# EAGLE board untitled (EAGLE 9.6.2)
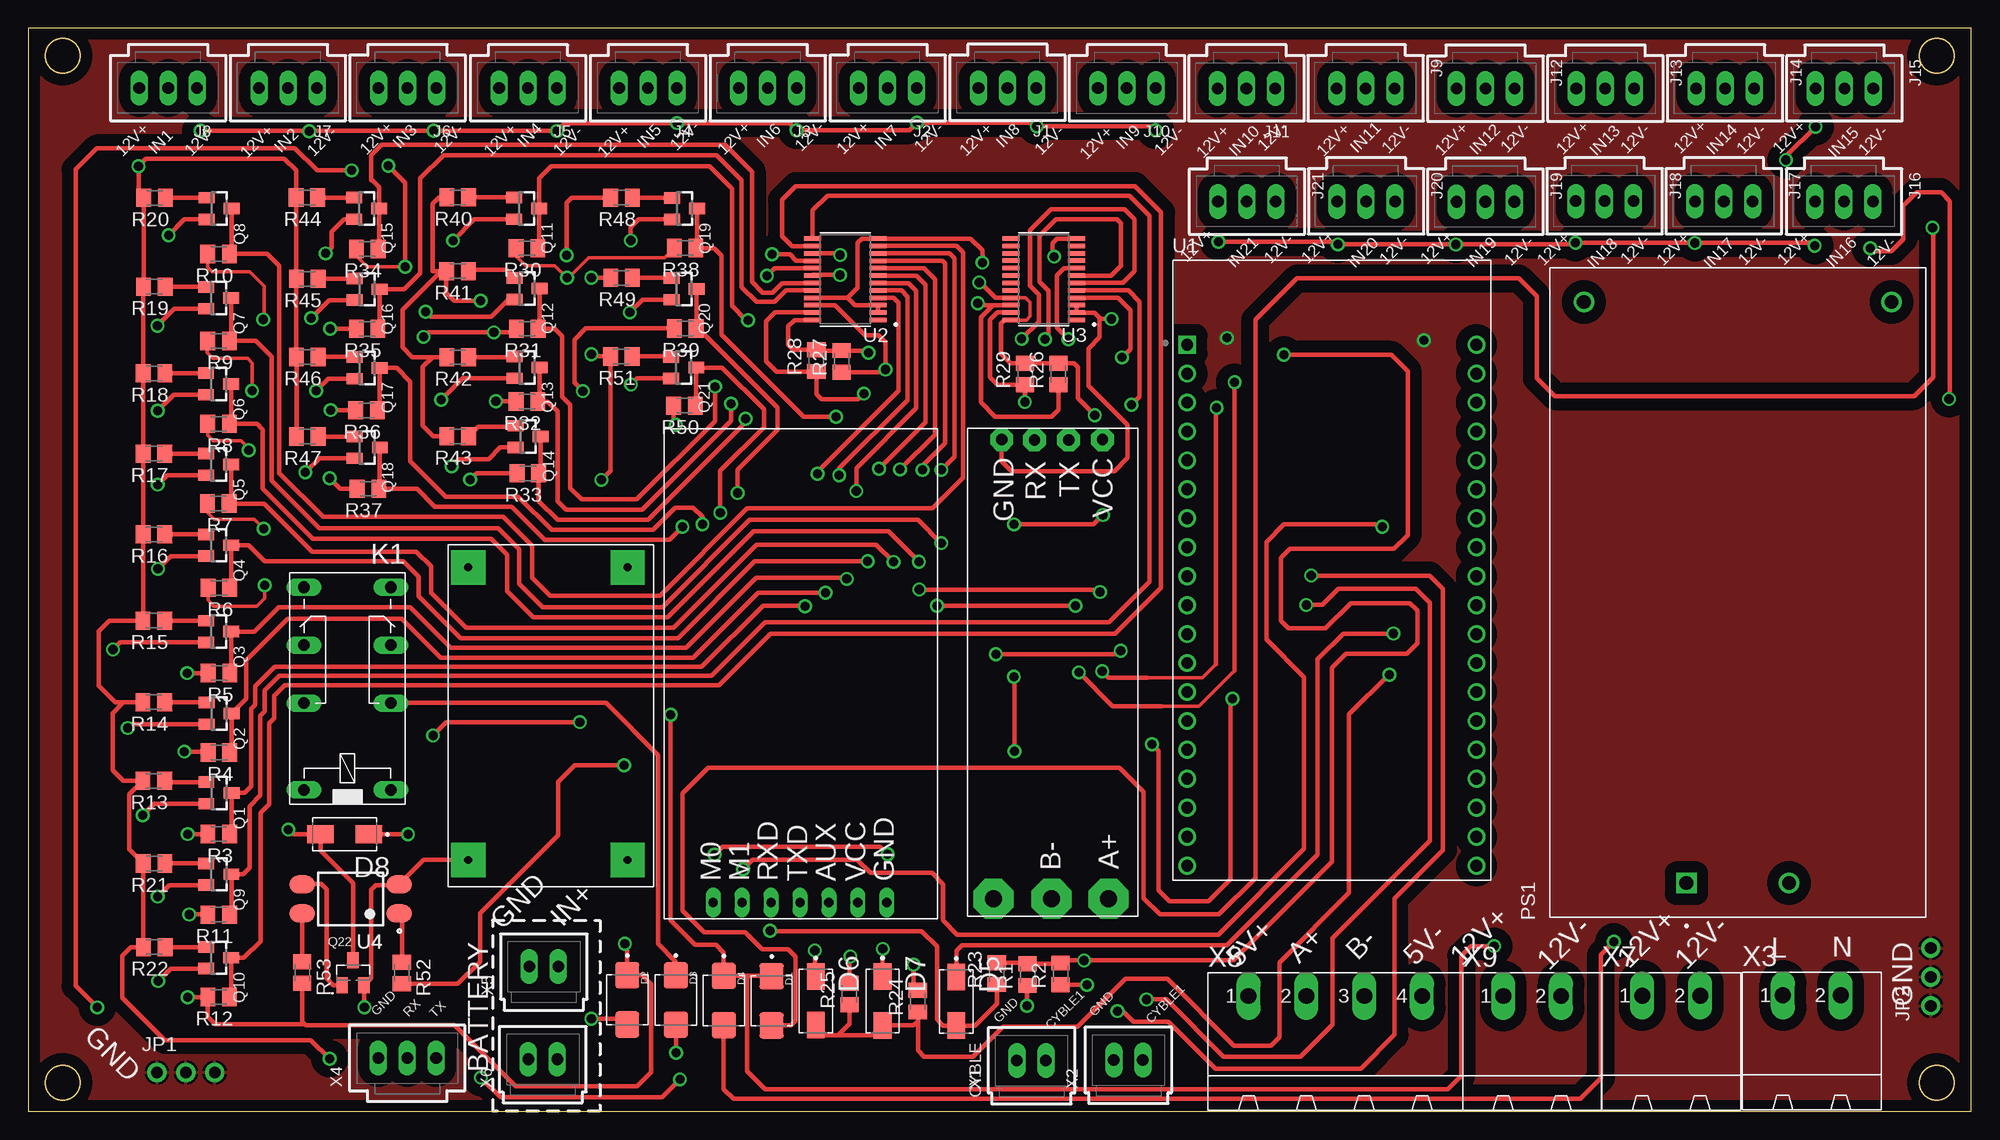
[diagram p0: board, top side]
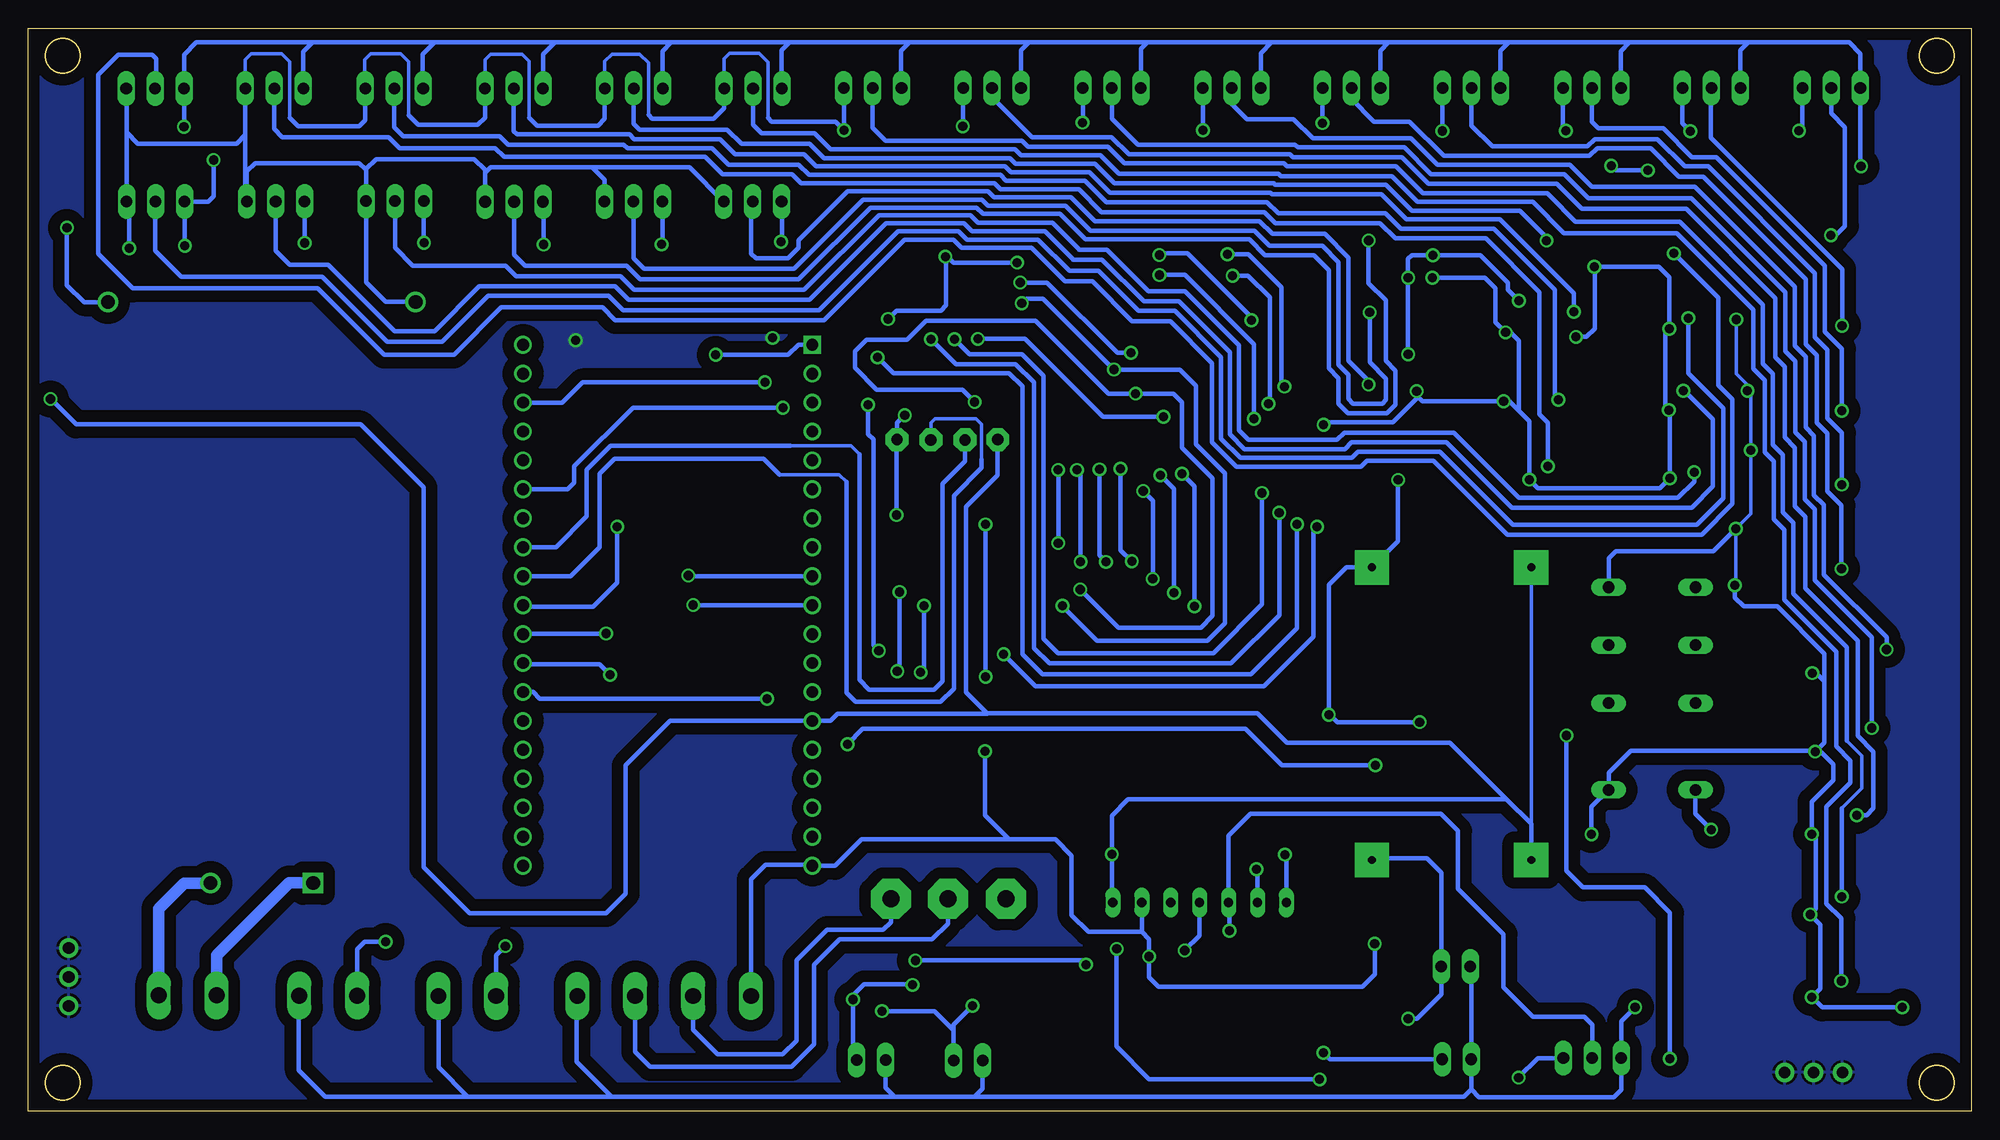
[diagram p1: board, bottom side, seen from below]

Size 170.5 x 95 mm. Coordinates in mm from the lower left corner, seen from the top.
Outline: 0,0 170.5,0 170.5,95 0,95 0,0
Outline: circle at 3,92.6 radius 1.5
Outline: circle at 3,2.5 radius 1.5
Outline: circle at 167.5,92.6 radius 1.5
Outline: circle at 167.5,2.5 radius 1.5
Copper layers (1*16): Top 0.035mm / dielectric 1.5mm / Bottom 0.035mm
Design rules "default": minimum track width 6mil, minimum drill 0.35mm, track to track 6mil, track to pad 6mil, pad to pad 6mil, via to via 6mil, smd to smd 6mil, copper to edge 40mil, drill to drill 6mil, minimum pad ring 10mil, minimum via ring 8mil, stop-mask expansion 4mil, vias tented up to drill 0mil, thermal gap 10mil

## Footprints (pad centres in the part's own frame; a part is rotated, then mirrored left to right if it is on the bottom)
DIOM5336X265N = smd 2.29 x 2.12: A 2.16,0; C -2.16,0
DIOM5226X240N = smd 2.33 x 1.55: A 2.135,0; C -2.135,0
EBYTEE220-900T22D = drill 0.8 pad 1.27 long: AUX -4.56,-10.98; GND -4.56,-16.06; M0 -4.56,-0.82; M1 -4.56,-3.36; RXD -4.56,-5.9; TXD -4.56,-8.44; VCC -4.56,-13.52
70543-03 = drill 1.016 long: 1 -2.54,0; 2 0,0; 3 2.54,0
1X03-CLEANBIG = drill 1.016 pad 1.676: 1 -2.54,0; 2 0,0; 3 2.54,0
351 = drill 1.016 long: 1 -3.81,-3.81; 16 -3.81,3.81; O1 8.89,-3.81; O2 8.89,3.81; P1 3.81,-3.81; P2 3.81,3.81; S1 13.97,-3.81; S2 13.97,3.81
MINI560 = drill 0.7 pad 3 square: IN+ 0,-1.27; IN- 0,-15.24; OUT+ 25.67,-1.27; OUT- 25.67,-15.24
CONV_HLK-20M12 = drill 1.2 square: 1 -25.5,4.5 | drill 1.2: 2 -25.5,-4.5; 3 25.5,13.5; 4 25.5,-13.5
SOT23-BEC = smd 1 x 1.4: B -0.95,-1.1; C 0,1.1; E 0.95,-1.1
SOT95P240X120-3N = smd 1 x 1.4: 1 -0.95,-1.1; 2 0.95,-1.1; 3 0,1.1
M0805 = smd 1.3 x 1.6: 1 -0.95,0; 2 0.95,0
TTL-RS485 = drill 1.5 pad 3.5 octagon: A -19.7,-6; B -19.7,-1; P$7 -19.7,4.1 | drill 1 pad 2 octagon: GND 20.6,3.37; RX 20.581,0.505; TX 20.583,-2.493; VCC 20.6,-5.47
MODULE_ESP32-DEVKITC-32D = drill 1.04 square: 1 -12.7,19.76 | drill 1.04: 2 -12.7,17.22; 3 -12.7,14.68; 4 -12.7,12.14; 5 -12.7,9.6; 6 -12.7,7.06; 7 -12.7,4.52; 8 -12.7,1.98; 9 -12.7,-0.56; 10 -12.7,-3.1; 11 -12.7,-5.64; 12 -12.7,-8.18; 13 -12.7,-10.72; 14 -12.7,-13.26; 15 -12.7,-15.8; 16 -12.7,-18.34; 17 -12.7,-20.88; 18 -12.7,-23.42; 19 -12.7,-25.96; 20 12.7,19.76; 21 12.7,17.22; 22 12.7,14.68; 23 12.7,12.14; 24 12.7,9.6; 25 12.7,7.06; 26 12.7,4.52; 27 12.7,1.98; 28 12.7,-0.56; 29 12.7,-3.1; 30 12.7,-5.64; 31 12.7,-8.18; 32 12.7,-10.72; 33 12.7,-13.26; 34 12.7,-15.8; 35 12.7,-18.34; 36 12.7,-20.88; 37 12.7,-23.42; 38 12.7,-25.96
SOP65P640X120-24N = smd 1.57 x 0.41: 1 -2.87,3.575; 2 -2.87,2.925; 3 -2.87,2.275; 4 -2.87,1.625; 5 -2.87,0.975; 6 -2.87,0.325; 7 -2.87,-0.325; 8 -2.87,-0.975; 9 -2.87,-1.625; 10 -2.87,-2.275; 11 -2.87,-2.925; 12 -2.87,-3.575; 13 2.87,-3.575; 14 2.87,-2.925; 15 2.87,-2.275; 16 2.87,-1.625; 17 2.87,-0.975; 18 2.87,-0.325; 19 2.87,0.325; 20 2.87,0.975; 21 2.87,1.625; 22 2.87,2.275; 23 2.87,2.925; 24 2.87,3.575
SOT254P975X400-4N = smd 2.25 x 1.6: 1 -4.25,1.27; 2 -4.25,-1.27; 3 4.25,-1.27; 4 4.25,1.27
70543-02 = drill 1.016 long: 1 -1.27,0; 2 1.27,0
MSTBA2 = drill 1.397 long: 1 -2.54,5.08; 2 2.54,5.08
MSTBA4 = drill 1.397 long: 1 -7.62,5.08; 2 -2.54,5.08; 3 2.54,5.08; 4 7.62,5.08

## Placement (x,y rotation side)
D1  SS24  [DIOM5336X265N]  65.22,9.67 270 top
D2  SS24  [DIOM5336X265N]  52.55,9.76 270 top
D3  SS24  [DIOM5336X265N]  56.82,9.75 270 top
D4  SS24  [DIOM5336X265N]  61.03,9.7 270 top
D5  US1M-13  [DIOM5226X240N]  81.44,9.63 270 top
D6  US1M-13  [DIOM5226X240N]  69.1,9.67 270 top
D7  US1M-13  [DIOM5226X240N]  74.96,9.67 270 top
D8  US1M-13  [DIOM5226X240N]  27.76,24.29 180 top
EBYTEE220-900T22D1  [EBYTEE220-900T22D]  59.27,22.87 90 top
J1  C-GRID-03-70543  [70543-03]  85.93,89.79 180 top
J2  C-GRID-03-70543  [70543-03]  75.41,89.78 180 top
J3  C-GRID-03-70543  [70543-03]  64.89,89.76 180 top
J4  C-GRID-03-70543  [70543-03]  54.38,89.76 180 top
J5  C-GRID-03-70543  [70543-03]  43.85,89.76 180 top
J6  C-GRID-03-70543  [70543-03]  33.27,89.78 180 top
J7  C-GRID-03-70543  [70543-03]  22.78,89.77 180 top
J8  C-GRID-03-70543  [70543-03]  12.26,89.77 180 top
J9  C-GRID-03-70543  [70543-03]  117.37,89.75 180 top
J10  C-GRID-03-70543  [70543-03]  96.41,89.76 180 top
J11  C-GRID-03-70543  [70543-03]  106.9,89.75 180 top
J12  C-GRID-03-70543  [70543-03]  127.89,89.72 180 top
J13  C-GRID-03-70543  [70543-03]  138.4,89.74 180 top
J14  C-GRID-03-70543  [70543-03]  148.92,89.75 180 top
J15  C-GRID-03-70543  [70543-03]  159.38,89.74 180 top
J16  C-GRID-03-70543  [70543-03]  159.35,79.82 180 top
J17  C-GRID-03-70543  [70543-03]  148.8,79.84 180 top
J18  C-GRID-03-70543  [70543-03]  138.33,79.84 180 top
J19  C-GRID-03-70543  [70543-03]  127.88,79.8 180 top
J20  C-GRID-03-70543  [70543-03]  117.4,79.83 180 top
J21  C-GRID-03-70543  [70543-03]  106.94,79.81 180 top
JP1  [1X03-CLEANBIG]  13.82,3.39 0 top
JP2  [1X03-CLEANBIG]  166.97,11.77 90 top
K1  351  [351]  28,32 90 top
MINI1  [MINI560]  53.85,47.71 270 top
PS1  HLK-20M12  [CONV_HLK-20M12]  150.02,45.51 90 top
Q1  MMBT2222  [SOT23-BEC]  16.72,27.92 270 top
Q2  MMBT2222  [SOT23-BEC]  16.72,34.89 270 top
Q3  MMBT2222  [SOT23-BEC]  16.71,42.08 270 top
Q4  MMBT2222  [SOT23-BEC]  16.7,49.66 270 top
Q5  MMBT2222  [SOT23-BEC]  16.69,56.75 270 top
Q6  MMBT2222  [SOT23-BEC]  16.68,63.81 270 top
Q7  MMBT2222  [SOT23-BEC]  16.7,71.36 270 top
Q8  MMBT2222  [SOT23-BEC]  16.75,79.2 270 top
Q9  MMBT2222  [SOT23-BEC]  16.72,20.78 270 top
Q10  MMBT2222  [SOT23-BEC]  16.7,13.46 270 top
Q11  MMBT2222  [SOT23-BEC]  43.73,79.21 270 top
Q12  MMBT2222  [SOT23-BEC]  43.77,72.17 270 top
Q13  MMBT2222  [SOT23-BEC]  43.77,65.26 270 top
Q14  MMBT2222  [SOT23-BEC]  43.87,59.19 270 top
Q15  MMBT2222  [SOT23-BEC]  29.7,79.21 270 top
Q16  MMBT2222  [SOT23-BEC]  29.71,72.12 270 top
Q17  MMBT2222  [SOT23-BEC]  29.73,65.22 270 top
Q18  MMBT2222  [SOT23-BEC]  29.74,58.23 270 top
Q19  MMBT2222  [SOT23-BEC]  57.59,79.19 270 top
Q20  MMBT2222  [SOT23-BEC]  57.54,72.14 270 top
Q21  MMBT2222  [SOT23-BEC]  57.52,65.24 270 top
Q22  S9013  [SOT95P240X120-3N]  28.48,12.15 0 top
R1  560  [M0805]  87.69,11.97 90 top
R2  560  [M0805]  90.59,12.04 90 top
R3  1k  [M0805]  16.7,24.32 180 top
R4  1k  [M0805]  16.71,31.47 180 top
R5  1k  [M0805]  16.73,38.44 180 top
R6  1k  [M0805]  16.71,45.92 180 top
R7  1k  [M0805]  16.67,53.32 180 top
R8  1k  [M0805]  16.69,60.31 180 top
R9  1k  [M0805]  16.69,67.58 180 top
R10  1k  [M0805]  16.69,75.21 180 top
R11  1k  [M0805]  16.71,17.24 180 top
R12  1k  [M0805]  16.69,10.01 180 top
R13  30k  [M0805]  11,28.98 180 top
R14  30k  [M0805]  11,35.88 180 top
R15  30k  [M0805]  11,43.04 180 top
R16  30k  [M0805]  11.01,50.62 180 top
R17  30k  [M0805]  11.01,57.69 180 top
R18  30k  [M0805]  11.03,64.74 180 top
R19  30k  [M0805]  11.05,72.35 180 top
R20  30k  [M0805]  11.07,80.14 180 top
R21  30k  [M0805]  11.03,21.73 180 top
R22  30k  [M0805]  11.04,14.39 180 top
R23  10k  [M0805]  84.99,12.06 90 top
R24  10k  [M0805]  78.06,9.65 90 top
R25  10k  [M0805]  72.06,10.27 90 top
R26  10k  [M0805]  90.4,64.68 90 top
R27  10k  [M0805]  71.37,65.79 90 top
R28  10k  [M0805]  69.15,65.85 90 top
R29  10k  [M0805]  87.47,64.69 90 top
R30  1k  [M0805]  43.75,75.72 180 top
R31  1k  [M0805]  43.78,68.65 180 top
R32  1k  [M0805]  43.76,62.27 180 top
R33  1k  [M0805]  43.83,55.97 180 top
R34  1k  [M0805]  29.73,75.66 180 top
R35  1k  [M0805]  29.73,68.65 180 top
R36  1k  [M0805]  29.68,61.49 180 top
R37  1k  [M0805]  29.8,54.61 180 top
R38  1k  [M0805]  57.63,75.73 180 top
R39  1k  [M0805]  57.64,68.68 180 top
R40  30k  [M0805]  37.67,80.18 180 top
R41  30k  [M0805]  37.66,73.7 180 top
R42  30k  [M0805]  37.68,66.15 180 top
R43  30k  [M0805]  37.68,59.21 180 top
R44  30k  [M0805]  24.44,80.17 180 top
R45  30k  [M0805]  24.46,73.03 180 top
R46  30k  [M0805]  24.47,66.18 180 top
R47  30k  [M0805]  24.46,59.19 180 top
R48  30k  [M0805]  52.05,80.15 180 top
R49  30k  [M0805]  52.06,73.13 180 top
R50  1k  [M0805]  57.58,61.91 180 top
R51  30k  [M0805]  52.04,66.23 180 top
R52  1k  [M0805]  32.78,12.12 270 top
R53  10k  [M0805]  24.02,12.16 270 top
TTL-RS1  [TTL-RS485]  88.8,38.32 90 top
U1  ESP32-DEVKITC-32D  [MODULE_ESP32-DEVKITC-32D]  114.4,47.5 0 top
U2  PCF8575PW  [SOP65P640X120-24N]  71.7,72.99 180 top
U3  PCF8575PW  [SOP65P640X120-24N]  89.11,72.99 180 top
U4  PC817X2NIP0F  [SOT254P975X400-4N]  28.28,18.62 180 top
X1  C-GRID-02-70543  [70543-02]  88.03,4.45 0 top
X2  C-GRID-02-70543  [70543-02]  96.54,4.48 0 top
X3  MSTBA2  [MSTBA2]  156.52,5.08 0 top
X4  C-GRID-03-70543  [70543-03]  33.24,4.66 0 top
X5  C-GRID-02-70543  [70543-02]  45.23,12.68 0 top
X6  C-GRID-02-70543  [70543-02]  45.14,4.55 0 top
X7  MSTBA2  [MSTBA2]  144.19,5.05 0 top
X8  MSTBA4  [MSTBA4]  114.7,5.02 0 top
X9  MSTBA2  [MSTBA2]  131.98,5.02 0 top

## Library data of the parts
D1-D4 = SS24; AVAILABILITY: In Stock; CHECK_PRICES: https://www.snapeda.com/parts/SS24/Onsemi/view-part/?ref=eda; DESCRIPTION: Diode Schottky 40V 2A Surface Mount DO-214AA (SMB); MF: ON Semiconductor; MP: SS24; PACKAGE: DO-214AA ON Semiconductor; PRICE: None; SNAPEDA_LINK: https://www.snapeda.com/parts/SS24/Onsemi/view-part/?ref=snap
D5-D8 = US1M-13; AVAILABILITY: In Stock; DESCRIPTION: Diode Standard 1000 V 1A Surface Mount SMA; MF: Diodes Incorporated; MP: US1M-13; PACKAGE: DO-214AC-214 Diodes Incorporated; PRICE: None; PURCHASE-URL: https://pricing.snapeda.com/search/part/US1M-13/?ref=eda
EBYTEE220-900T22D1 = EByte E220-900T22D
J1-J21 X1 X2 X4-X6 = con-molex; MF: MOLEX; OC_FARNELL: unknown; OC_NEWARK: unknown
JP1 JP2 = adafruit
K1 = relay; OC_FARNELL: unknown; OC_NEWARK: unknown
MINI1 = MINI560
PS1 = HLK-20M12; AVAILABILITY: Not in stock; CHECK_PRICES: https://www.snapeda.com/parts/HLK-20M12/Hi-link/view-part/?ref=eda; DESCRIPTION: 20W ultra-small series module power supply; MF: Hi-link; MP: HLK-20M12; PACKAGE: Non-Standard Hi-link; PRICE: None; SNAPEDA_LINK: https://www.snapeda.com/parts/HLK-20M12/Hi-link/view-part/?ref=snap
Q1-Q21 = MMBT2222_; AVAILABILITY: In Stock; CHECK_PRICES: https://www.snapeda.com/parts/MMBT2222/Onsemi/view-part/?ref=eda; DESCRIPTION: Bipolar (BJT) Transistor NPN 30 V 600 mA 250MHz 300 mW Surface Mount SOT-23-3 (TO-236); MF: ON Semiconductor; MP: MMBT2222; PACKAGE: SOT-23-3 Fairchild Semiconductor; PRICE: None; SNAPEDA_LINK: https://www.snapeda.com/parts/MMBT2222/Onsemi/view-part/?ref=snap
Q22 = S9013; AVAILABILITY: In Stock; DESCRIPTION: Bipolar (BJT) Transistor NPN 20V 500mA 625mW Through Hole TO-92-3; MF: JCET; MP: S9013; PACKAGE: SOT-23-3 JCET; PRICE: None; PURCHASE-URL: https://pricing.snapeda.com/search/part/S9013/?ref=eda
R1-R53 = rcl; SPICEPREFIX: R
TTL-RS1 = TTL-RS485
U1 = ESP32-DEVKITC-32D; AVAILABILITY: In Stock; DESCRIPTION: WiFi Development Tools (802.11) ESP32 General Development Kit, ESP32-WROOM-32D on the board; MF: Espressif Systems; MP: ESP32-DEVKITC-32D; PACKAGE: None; PRICE: None; PURCHASE-URL: https://pricing.snapeda.com/search/part/ESP32-DEVKITC-32D/?ref=eda
U2 U3 = PCF8575PW; AVAILABILITY: In Stock; CHECK_PRICES: https://www.snapeda.com/parts/PCF8575PW/Texas+Instruments/view-part/?ref=eda; DESCRIPTION: 16-bit 2.5- to 5.5-V I2C/SMBus I/O expander with interrupt; MF: Texas Instruments; MP: PCF8575PW; PACKAGE: TSSOP-24 Texas Instruments; PRICE: None; PURCHASE-URL: https://www.snapeda.com/api/url_track_click_mouser/?unipart_id=1203644&manufacturer=Texas Instruments&part_name=PCF8575PW&search_term=pcf8575; SNAPEDA_LINK: https://www.snapeda.com/parts/PCF8575PW/Texas+Instruments/view-part/?ref=snap
U4 = PC817X2NIP0F; AVAILABILITY: Not in stock; DESCRIPTION: Optoisolator Transistor Output 5000Vrms 1 Channel 4-SMD; MF: Sharp Microelectronics; MP: PC817X2NIP0F; PACKAGE: SMD-4 Sharp Microelectronics; PRICE: None
X3 X7 X9 = con-phoenix-508; MF: FARNELL; MPN: 1757242; OC_FARNELL: 3705171; OC_NEWARK: 71C4161
X8 = con-phoenix-508; MF: FARNELL; MPN: 1757268; OC_FARNELL: 3705195; OC_NEWARK: 71C4163

## Nets
3V3: R1.2 R2.2 R23.2 R24.2 U1.1
5V+: D2.A MINI1.OUT+ X5.2
12V+: D1.C D4.C J1.3 J2.3 J3.3 J4.3 J5.3 J6.3 J7.3 J8.3 J9.3 J10.3 J11.3 J12.3 J13.3 J14.3 J15.3 J16.3 J17.3 J18.3 J19.3 J20.3 J21.3 MINI1.IN+ R13.2 R14.2 R15.2 R16.2 R17.2 R18.2 R19.2 R20.2 R21.2 R22.2 R40.2 R41.2 R42.2 R43.2 R44.2 R45.2 R46.2 R47.2 R48.2 R49.2 R51.2 X9.1
12V++: D1.A PS1.4
A0: Q1.C R3.1 U2.4
A1: Q2.C R4.1 U2.5
A2: Q3.C R5.1 U2.6
A3: Q4.C R6.1 U2.7
A4: Q5.C R7.1 U2.8
A5: Q6.C R8.1 U2.9
A6: Q7.C R9.1 U2.10
A7: Q8.C R10.1 U2.11
A8: Q9.C R11.1 U2.13
A9: Q10.C R12.1 U2.14
A10: Q11.C R30.1 U2.15
A11: Q12.C R31.1 U2.16
A12: Q13.C R32.1 U2.17
A13: Q14.C R33.1 U2.18
A14: Q15.C R34.1 U2.19
A15: Q16.C R35.1 U2.20
A16: Q17.C R36.1 U3.4
A17: Q18.C R37.1 U3.5
A18: Q19.C R38.1 U3.6
A19: Q20.C R39.1 U3.7
A20: Q21.C R50.1 U3.8
A+: TTL-RS1.A X8.2
B-: TTL-RS1.B X8.3
BATT: R52.2 U1.32
BATT+: D3.C K1.P1
CYBLE1: R1.1 U1.9 X1.2
CYBLE2: R2.1 U1.10 X2.2
GND: EBYTEE220-900T22D1.GND EBYTEE220-900T22D1.M0 J1.1 J2.1 J3.1 J4.1 J5.1 J6.1 J7.1 J8.1 J9.1 J10.1 J11.1 J12.1 J13.1 J14.1 J15.1 J16.1 J17.1 J18.1 J19.1 J20.1 J21.1 MINI1.IN- MINI1.OUT- PS1.3 Q22.2 TTL-RS1.GND U1.14 U2.2 U2.3 U2.12 U2.21 U3.2 U3.3 U3.12 U4.2 X1.1 X2.1 X4.1 X5.1 X6.1 X7.2 X8.4 X9.2
GND1: JP1.1 JP1.2 JP1.3 JP2.1 JP2.2 JP2.3
GND2: U1.26
GND3: U1.20
L: PS1.1 X3.1
M1: EBYTEE220-900T22D1.M1 U1.29
N: PS1.2 X3.2
N$1: Q1.B R13.1
N$2: Q2.B R14.1
N$3: D3.A X6.2
N$4: Q3.B R15.1
N$5: Q4.B R16.1
N$6: Q5.B R17.1
N$7: Q6.B R18.1
N$8: Q7.B R19.1
N$9: Q8.B R20.1
N$10: Q9.B R21.1
N$11: Q10.B R22.1
N$12: J1.2 Q1.E
N$13: J2.2 Q2.E
N$14: J3.2 Q3.E
N$15: J4.2 Q4.E
N$16: J5.2 Q5.E
N$17: J6.2 Q6.E
N$18: J7.2 Q7.E
N$19: J8.2 Q8.E
N$20: J10.2 Q9.E
N$21: J11.2 Q10.E
N$22: D4.A X7.1
N$23: D6.C EBYTEE220-900T22D1.TXD
N$24: D5.C U1.30
N$25: D7.C X4.3
N$26: Q11.B R40.1
N$27: Q12.B R41.1
N$28: Q13.B R42.1
N$29: Q14.B R43.1
N$30: Q15.B R44.1
N$31: Q16.B R45.1
N$32: Q17.B R46.1
N$33: Q18.B R47.1
N$34: Q19.B R48.1
N$35: Q20.B R49.1
N$36: J9.2 Q11.E
N$37: J12.2 Q12.E
N$38: J13.2 Q13.E
N$39: J14.2 Q14.E
N$40: J15.2 Q15.E
N$41: J16.2 Q16.E
N$42: J17.2 Q17.E
N$43: J18.2 Q18.E
N$44: J19.2 Q19.E
N$45: J20.2 Q20.E
N$46: Q21.B R51.1
N$47: J21.2 Q21.E
N$48: R52.1 U4.1
N$50: R53.1 U4.4
N$52: D8.A K1.16 Q22.3
N$53: Q22.1 U4.3
RX1: TTL-RS1.RX U1.27
RX_LORA: D5.A EBYTEE220-900T22D1.RXD R23.1 X4.2
SCL: R26.1 R27.1 U1.22 U2.22 U3.22
SDA: R28.1 R29.1 U1.25 U2.23 U3.23
TX1: TTL-RS1.TX U1.28
TX_LORA: D6.A D7.A R24.1 R25.1 U1.31
VCC: D2.C D8.C EBYTEE220-900T22D1.VCC K1.1 K1.S1 R3.2 R4.2 R5.2 R6.2 R7.2 R8.2 R9.2 R10.2 R11.2 R12.2 R25.2 R26.2 R27.2 R28.2 R29.2 R30.2 R31.2 R32.2 R33.2 R34.2 R35.2 R36.2 R37.2 R38.2 R39.2 R50.2 R53.2 TTL-RS1.VCC U1.19 U2.24 U3.21 U3.24 X8.1

## Tracks (layer width: path | path; a pad name or v marks a point on that pad's centre or on a via)
3V3  (via drill 0.8 pad 1.2)
  Top 0.406: R23.2 87.61,13.01 R1.2 90.52,12.92 R2.2 90.82,13.22 v92.66,13.22 105.75,13.22 114.41,21.88 114.41,38.89 115.64,40.12 120.97,40.12 121.9,41.06 121.9,43.93 121.26,44.57 116.06,44.57 113.85,42.37 110.58,42.37 109.92,43.03 109.92,48.55 110.7,49.33 119.85,49.33 121.07,50.54 121.07,64.94 119.64,66.37 v110.18,66.37 | v77.68,12.86 77.68,10.97 R24.2
  Bottom 0.406: v92.66,13.22 78.04,13.22 v77.68,12.86 | v110.18,66.37 103.81,66.37 102.92,67.26 U1.1
5V+  (via drill 0.8 pad 1)
  Top 0.406: v49.4,8.1 52.05,8.1 D2.A
  Bottom 0.406: MINI1.OUT+ 52.42,22.19 47.75,22.19 46.5,20.94 X5.2 46.49,10.23 48.63,8.1 v49.4,8.1
12V+  (via drill 0.8 pad 1.05, 0.8 pad 1.2)
  Top 0.406: R47.2 23.52,59.2 R46.2 R45.2 23.49,73.06 R44.2 23.49,82.54 22.46,83.57 10.31,83.57 v9.65,82.91 9.65,80.61 R20.2 10.12,72.37 R19.2 10.08,72.33 R18.2 10.06,64.73 R17.2 R16.2 R15.2 7.09,43.04 6.15,42.1 6.15,37.35 7.61,35.88 R14.2 8.33,35.88 7.38,34.93 7.38,29.9 8.3,28.98 R13.2 8.85,27.78 8.85,22.96 R21.2 R22.2 8.99,14.39 8.24,13.64 8.24,9.95 11.96,6.23 24.79,6.23 v26.43,4.59 | R41.2 35.47,73.7 35.47,79.61 36.05,80.18 R40.2 36.73,80.19 | R41.2 36.22,73.7 32.82,70.31 32.82,67.03 33.7,66.15 R42.2 35.46,66.15 34.61,65.3 34.61,60.14 35.54,59.21 R43.2 | R49.2 51.09,73.12 v49.41,73.12 | 51.11,66.24 R51.2 | v104.45,76.3 114.69,76.3 v114.93,76.05 v125.28,76.05 v125.29,76.05 135.64,76.05 v135.79,76.19 146.25,76.19 v146.27,76.18 156.55,76.18 156.78,75.95 v156.78,75.93 | v154.26,83.46 154.26,83.78 v156.86,86.38 | R51.2 49.59,66.23 v49.41,66.41 | v47.24,75.11 47.24,79.71 47.69,80.15 R48.2 | R51.2 51.09,56.2 v50.28,55.39 | 65.22,11.81 D1.C 65.19,11.86 63.05,11.86 | v56.37,34.77 56.35,34.75 56.35,16.75 58.53,14.58 60.37,14.58 61.03,13.91 D4.C 63.05,11.86 | v128.64,14.48 126.6,14.48 125.77,13.64 125.77,3.09 124.6,1.93 64.64,1.93 63.05,3.51 63.05,11.86 | v35.51,32.96 36.68,34.14 v48.4,34.14 | v39.68,71.1 37.34,71.1 36.64,71.8 36.64,73.63 R41.2
  Bottom 0.406: v9.65,82.91 9.76,83.02 9.72,83.05 J8.3 9.72,92.8 10.7,93.78 19.56,93.78 | J7.3 20.24,93.1 19.56,93.78 | 19.56,93.78 29.98,93.78 | 29.98,93.78 30.74,93.02 J6.3 | 29.98,93.78 40.58,93.78 | 40.58,93.78 41.32,93.05 41.32,89.77 J5.3 | 40.58,93.78 51.12,93.78 | J4.3 51.84,93.06 51.12,93.78 | 51.12,93.78 61.4,93.78 | J3.3 62.35,92.83 61.4,93.78 | 61.4,93.78 72.3,93.78 | J2.3 72.87,93.21 72.3,93.78 | 72.3,93.78 82.68,93.78 | J1.3 83.39,93.08 82.68,93.78 | 82.68,93.78 93.19,93.78 | 93.19,93.78 93.92,93.05 93.92,89.81 J10.3 | 93.19,93.78 103.7,93.78 | 103.7,93.78 104.4,93.09 104.4,89.78 J11.3 | 103.7,93.78 114.09,93.78 | 114.09,93.78 114.86,93.01 114.86,89.78 J9.3 | 114.09,93.78 124.29,93.78 | J12.3 125.35,92.73 124.29,93.78 | 124.29,93.78 134.85,93.78 | 134.85,93.78 135.89,92.74 135.89,89.77 J13.3 | 134.85,93.78 145.55,93.78 | J14.3 146.38,92.95 145.55,93.78 | 145.55,93.78 155.77,93.78 156.84,92.71 J15.3 156.84,86.39 v156.86,86.38 | 156.8,77.66 156.8,77.97 | 156.8,77.97 J16.3 | J16.3 | J17.3 v146.26,76.18 v146.27,76.18 | J18.3 v135.79,76.2 v135.79,76.19 | J19.3 125.3,79.76 125.3,76.97 125.29,76.96 v125.29,76.05 | 114.84,79.81 J20.3 114.86,76.12 v114.93,76.05 | J21.3 104.35,79.77 104.35,76.39 v104.45,76.3 | v154.26,83.46 154.26,80.26 154.74,79.78 156.76,79.78 J16.3 | v156.78,75.93 156.78,77.94 156.8,77.97 | v49.41,66.41 v49.41,73.12 49.41,74.78 49.08,75.11 v47.24,75.11 43.05,75.11 40.65,72.71 40.65,72.06 v39.68,71.1 | v50.28,55.39 50.28,50 MINI1.IN+ 54.84,47.7 56.37,46.17 56.37,34.89 | v56.37,34.77 56.37,34.89 | X9.1 129.44,13.68 v128.64,14.48 | v26.43,4.59 26.43,17.41 28.65,19.62 34.05,19.62 35.51,21.08 35.51,21.09 v35.51,32.96
  Bottom 0.406: v48.4,34.14 55.62,34.14 56.37,34.89
12V++  (via drill 0.8 pad 1.2)
  Top 0.406: v167.12,77.51 167.18,77.45 167.18,64.41 165.51,62.74 133.96,62.74 132.37,64.32 132.37,71.51 130.81,73.08 111.34,73.08 107.68,69.42 107.68,20.44 104.5,17.25 99.29,17.25 97.88,18.67 97.88,28.04 95.78,30.14 59.65,30.14 57.4,27.89 57.4,17.59 59.3,15.69 62.88,15.69 64.37,14.2 66.67,14.2 67.33,13.54 67.33,7.91 66.94,7.51 D1.A
  Bottom 0.406: v167.12,77.51 167.12,72.48 165.62,70.98 163.54,70.98 PS1.4
A0  (via drill 0.8 pad 1.2)
  Top 0.406: R3.1 17.82,24.49 Q1.C 18.98,27.92 19.56,28.5 19.56,35.3 19.9,35.64 19.9,37.29 21.6,38.99 59.08,38.99 64.46,44.37 68.08,44.37 v68.15,44.29 | v69.25,55.94 69.25,56.11 76.36,63.22 76.36,70.92 75.92,71.37 U2.4
  Bottom 0.406: v68.15,44.29 68.15,54.84 v69.25,55.94
A1  (via drill 0.8 pad 1.2)
  Top 0.406: R4.1 17.82,31.63 Q2.C 17.84,34.89 19.13,36.18 19.13,39.57 22.76,43.2 32.75,43.2 36.16,39.79 58.35,39.79 64.04,45.48 v69.96,45.48 | v71.16,55.8 71.16,56.39 77.16,62.39 77.16,71.47 76.61,72.02 U2.5
  Bottom 0.406: v69.96,45.48 69.96,54.61 v71.16,55.8
A2  (via drill 0.8 pad 1.2)
  Top 0.406: R5.1 17.81,38.57 Q3.C 19.8,42.08 21.95,44.23 33.49,44.23 37.06,40.66 57.7,40.66 63.85,46.81 71.71,46.81 v71.82,46.7 | v72.66,54.42 72.66,56.41 77.92,61.66 77.92,72 77.24,72.67 U2.6
  Bottom 0.406: v71.82,46.7 71.82,53.54 72.66,54.38 v72.66,54.42
A3  (via drill 0.8 pad 1.2)
  Top 0.406: R6.1 17.8,46.05 Q4.C 19.31,49.66 20.71,48.25 32.88,48.25 34.26,46.88 34.26,45.19 37.93,41.51 57.01,41.51 63.74,48.25 v73.66,48.25 | v74.65,56.37 78.73,60.44 78.73,72.52 77.93,73.32 U2.7
  Bottom 0.406: v73.66,48.25 74.65,49.23 v74.65,56.37
A4  (via drill 0.8 pad 1.2)
  Top 0.406: Q5.C 17.79,53.49 R7.1 20.69,53.32 24.91,49.1 34.03,49.1 35.33,47.8 35.33,45.48 38.4,42.41 56.62,42.41 63.92,49.71 74.41,49.71 v75.92,48.19 | v76.5,56.31 79.56,59.37 79.56,72.99 78.58,73.97 U2.8
  Bottom 0.406: v75.92,48.19 76.5,48.78 v76.5,56.31
A5  (via drill 0.8 pad 1.2)
  Top 0.406: Q6.C 17.78,60.44 R8.1 20.07,60.31 20.57,59.81 20.57,54.62 24.96,50.23 40.59,50.23 42.02,48.81 42.02,45.61 44.3,43.32 56.09,43.32 63.65,50.89 75.47,50.89 v78.15,48.21 | v78.47,56.27 78.47,56.62 80.44,58.6 80.44,74.38 80.21,74.62 U2.9
  Bottom 0.406: v78.15,48.21 78.15,55.87 78.51,56.23 | 78.51,56.23 | 78.51,56.23 v78.47,56.27
A6  (via drill 0.8 pad 1.2)
  Top 0.406: Q7.C 17.8,67.75 R9.1 19.93,67.58 21.34,66.18 21.34,55.32 25.51,51.15 41.21,51.15 43.08,49.28 43.08,46.27 45.12,44.23 55.65,44.23 63.29,51.87 78.09,51.87 v80.11,49.85 | v80.12,56.27 81.27,57.41 81.27,74.82 80.82,75.27 U2.10
  Bottom 0.406: v80.11,49.85 80.11,56.26 v80.12,56.27
A7
  Top 0.406: Q8.C 17.85,75.42 R10.1 20.97,75.21 22.02,74.17 22.02,55.99 25.87,52.14 41.65,52.14 44.19,49.59 44.19,46.82 45.77,45.24 55.42,45.24 63.07,52.89 79.35,52.89 82.04,55.58 82.04,75.36 81.47,75.93 U2.11
A8
  Top 0.406: R11.1 17.82,17.4 Q9.C 18.85,20.78 19.4,21.33 19.4,26.75 20.35,27.7 20.35,34.69 20.73,35.07 20.73,36.94 21.99,38.2 59.95,38.2 64.66,42.91 94.85,42.91 98.38,46.43 98.38,78.58 96.62,80.33 70.11,80.33 68.81,79.03 68.81,76.58 U2.13
A9
  Top 0.406: R12.1 17.8,10.17 Q10.C 18.91,13.46 20.36,14.92 20.36,26.17 21.12,26.93 21.12,34.03 21.55,34.46 21.55,36.44 22.47,37.35 60.59,37.35 65.13,41.89 95.38,41.89 99.42,45.93 99.42,78.87 97.12,81.17 67.35,81.17 66.14,79.97 66.14,76.76 67.02,75.89 68.8,75.89 U2.14
A10  (via drill 0.8 pad 1.2)
  Top 0.406: R30.1 44.83,75.84 Q11.C 44.83,81.85 45.89,82.9 59.77,82.9 61.74,80.93 61.74,70.65 62.99,69.4 v63.16,69.4 | v71.24,75.13 71.11,75.27 U2.15
  Bottom 0.406: v63.16,69.4 63.16,69.67 68.78,75.29 71.08,75.29 v71.24,75.13
A11  (via drill 0.8 pad 1.2)
  Top 0.406: Q12.C 44.87,68.8 R31.1 46.19,68.65 46.84,68 46.84,62.7 47.55,61.99 47.55,54.66 48.54,53.67 53.39,53.67 60.27,60.56 v60.27,63.57 v60.26,63.58 | v65.27,75.18 66.82,75.18 67.39,74.62 U2.16
  Bottom 0.406: v60.26,63.58 60.53,63.85 60.53,72.29 63.43,75.18 v65.27,75.18
A12  (via drill 0.8 pad 1.2)
  Top 0.406: Q13.C 44.87,62.43 R32.1 45.58,62.27 46.44,61.41 46.44,53.51 47.17,52.77 53.84,52.77 61.66,60.58 v61.66,62.05 v61.66,62.06 | U2.17 65.47,73.97 v64.81,73.31
  Bottom 0.406: v64.81,73.31 63.45,73.31 61.55,71.41 61.55,62.17 v61.66,62.06
A13  (via drill 0.8 pad 1.2)
  Top 0.406: Q14.C 44.97,56.16 R33.1 44.78,53.53 46.42,51.89 54.38,51.89 62.94,60.45 v62.94,60.75 | v71.23,73.37 68.88,73.37 U2.18
  Bottom 0.406: v62.94,60.75 62.94,67.31 69,73.37 v71.23,73.37
A14
  Top 0.406: R34.1 30.8,75.77 Q15.C 30.8,81.08 30.19,81.7 30.07,81.7 30.07,83.88 31,84.81 61.12,84.81 63.5,82.44 63.5,72.76 64.45,71.81 65.3,71.81 66.16,72.67 U2.19
A15
  Top 0.406: R35.1 30.81,68.79 Q16.C 32.99,72.12 34.39,73.52 34.39,81.85 36.44,83.9 60.4,83.9 62.6,81.69 62.6,72.29 63.89,71 65.48,71 66.49,72.02 U2.20
A16  (via drill 0.8 pad 1.2)
  Top 0.406: R36.1 30.83,61.69 Q17.C 32.3,65.22 33.51,64.01 33.51,57.02 36.61,53.92 42.98,53.92 45.9,51 54.82,51 56.77,52.95 58.34,52.95 59.15,52.14 v59.15,51.49 | v95.97,66.14 96.71,66.87 96.71,70.29 95.63,71.37 U3.4
  Bottom 0.406: v59.15,51.49 59.15,42.36 63.19,38.32 81.51,38.32 83.27,40.08 83.27,63.58 84.43,64.75 94.58,64.75 v95.97,66.14
A17  (via drill 0.8 pad 1.2)
  Top 0.406: Q18.C 30.84,54.7 R37.1 34.09,54.61 35.66,53.05 42.41,53.05 45.32,50.13 56.25,50.13 v57.4,51.28 | U3.5 96.54,72.02 97.52,71.04 97.52,62.7 v96.8,61.98 | v84.91,40.09 95.55,40.09 95.86,40.39 v95.87,40.39
  Bottom 0.406: v57.4,51.28 57.73,50.95 57.73,41.61 62.06,37.28 82.1,37.28 v84.91,40.09 | v95.87,40.39 96.33,40.86 96.33,58.94 96.8,59.4 v96.8,61.98
A18  (via drill 0.8 pad 1.2)
  Top 0.406: Q19.C 58.69,75.84 R38.1 60.16,75.73 60.81,75.08 60.81,68.15 68.03,60.93 v70.87,60.93 | v87.17,67.76 88.68,69.27 88.68,71.62 87.9,72.4 87.9,77.28 89.75,79.14 96.19,79.14 97.07,78.25 97.07,73.69 96.05,72.67 U3.6
  Bottom 0.406: v70.87,60.93 76.2,60.93 83.03,67.76 v87.17,67.76
A19  (via drill 0.8 pad 1.2)
  Top 0.406: Q20.C 58.65,68.73 R39.1 58.77,68.68 65.74,61.71 65.74,59.77 62.24,56.27 v62.24,54.24 | v89.22,67.73 89.53,68.05 89.53,72 88.75,72.78 88.75,76.83 90.18,78.27 95.53,78.27 95.88,77.92 95.88,74.19 95,73.32 U3.7
  Bottom 0.406: v62.24,54.24 62.24,44.46 66.52,40.18 80.15,40.18 81.42,41.46 81.42,64.55 83.3,66.42 87.91,66.42 v89.22,67.73
A20  (via drill 0.8 pad 1.2)
  Top 0.406: R50.1 58.53,62.44 58.62,62.52 Q21.C 60.89,65.24 64.55,61.58 64.55,60.02 60.72,56.19 v60.72,52.5 | v91.29,67.74 90.28,68.74 90.28,73.36 90.9,73.98 U3.8
  Bottom 0.406: v60.72,52.5 60.72,43.53 64.97,39.28 80.9,39.28 82.25,40.63 82.25,63.95 83.85,65.55 89.1,65.55 v91.29,67.74
A+
  Bottom 0.406: X8.2 112.16,7.14 110,4.98 104.29,4.98 103.08,6.18 103.08,13.23 100.42,15.9 95.48,15.9 94.8,16.57 TTL-RS1.A
B-
  Bottom 0.406: X8.3 117.24,5.21 115.93,3.89 103.52,3.89 101.53,5.88 101.53,12.83 99.29,15.07 91.18,15.07 89.8,16.45 TTL-RS1.B
BATT  (via drill 0.8 pad 1.2)
  Top 0.406: R52.2 37.68,11.17 39.64,13.13 39.64,17.35 46.5,24.21 46.5,28.92 47.92,30.34 v52.28,30.34 | v98.62,32.2 99.19,31.63 99.19,19.38 100.16,18.41 103.56,18.41 105.52,20.36 105.52,36.02 v105.67,36.18
  Bottom 0.406: v52.28,30.34 60.46,30.34 63.66,33.55 97.27,33.55 v98.62,32.2 | U1.32 126.2,36.78 125.62,36.2 105.7,36.2 v105.67,36.18
BATT+
  Top 0.406: K1.P1 50.68,35.81 55.24,31.25 55.24,14.67 56.82,13.1 D3.C
CYBLE1  (via drill 0.8 pad 1.2)
  Top 0.406: v87.65,9.25 87.65,10.98 R1.1 | v95.58,8.77 96.05,8.77 96.98,7.85 100.05,7.85 104.17,3.73 116.94,3.73 119.89,6.69 119.89,18.65 124.15,22.9 124.15,45.84 123,46.99 112.6,46.99 v112.59,46.99
  Bottom 0.406: X1.2 89.3,7.1 | 89.3,7.1 89.3,7.6 v87.65,9.25 | 89.3,7.1 90.97,8.77 v95.58,8.77 | v112.59,46.99 112.53,46.94 U1.9
CYBLE2  (via drill 0.8 pad 1.2)
  Top 0.406: v92.9,11.08 90.61,11.08 R2.1 | v98.13,9.8 99.89,9.8 104.9,4.79 111.65,4.79 114.43,7.57 114.43,15.18 123,23.74 123,44.63 121.77,45.85 115,45.85 113.56,44.41 v112.16,44.41
  Bottom 0.406: X2.2 98.13,4.81 v98.13,9.8 98.13,10.15 97.16,11.12 92.94,11.12 v92.9,11.08 | v112.16,44.41 112.14,44.4 U1.10
GND  (via drill 0.8 pad 1.2)
  Top 0.406: v15.1,86.02 24.64,86.02 v24.64,85.99 24.67,86.02 v35.55,86.02 46.36,86.02 46.37,86.01 v46.39,86.01 47.08,86.69 v56.92,86.69 v56.93,86.7 66.79,86.7 v67.41,86.08 77.32,86.08 v77.99,86.74 88.19,86.74 v88.5,86.43 98.54,86.43 v98.91,86.06 | U2.21 71.91,71.37 | 71.91,71.37 72.56,70.72 U2.3 U2.2 | 71.91,71.37 72.78,72.24 72.78,76.18 73.17,76.57 U2.12 82.7,76.57 83.72,75.54 v83.72,74.46 | U3.3 U3.2 93.56,70.07 94.02,69.61 | MINI1.OUT- 34.67,22.03 U4.2 32.48,19.84 30.48,19.84 30.06,19.42 30.06,11.68 Q22.2 29.48,11 v29.48,9.12 | v60.22,22.51 60.91,23.2 74.76,23.2 v75.42,22.54 | 94.02,69.61 94.02,67.89 93.02,66.88 93.02,63.65 96.45,60.21 96.45,57.31 95.3,56.16 86.28,56.16 85.41,57.02 85.41,58.9 TTL-RS1.GND | v168.57,62.49 168.65,62.58 168.65,79.86 167.87,80.64 165.75,80.64 164.56,79.46 164.56,76.53 163.5,75.47 161.9,75.47 v161.65,75.72 | U3.12 90.28,76.57 89.86,76.16 89.86,75.14 v90.02,74.98 | v95.06,69.51 94.11,69.51 94.02,69.61
  Bottom 0.305: 105.59,87.16 105.59,92.05 106.36,92.82 108.96,92.82 109.44,92.34 J11.1 | 116.08,87.41 116.08,91.99 116.85,92.76 119.28,92.76 119.91,92.13 J9.1 | 126.54,87.17 126.54,92.11 127.18,92.74 129.93,92.74 130.43,92.25 J12.1 | 137.13,87.37 137.13,92.07 137.83,92.77 140.45,92.77 140.97,92.24 140.97,89.77 J13.1 | 147.59,87.18 147.59,92.09 148.27,92.76 150.96,92.76 151.46,92.26 J14.1 | 38.6,25.21 MINI1.IN-
  Bottom 0.406: X5.1 43.87,12.59 X6.1 43.87,1.9 | 43.87,1.9 43.19,1.22 31.34,1.22 30.7,1.86 X4.1 30.7,7.9 v29.48,9.12 | 161.89,85.89 J16.1 161.65,79.58 v161.65,75.72 | 161.89,85.89 161.89,89.7 J15.1 | PS1.3 139.16,71.01 140.87,72.72 J18.1 140.86,79.85 140.86,82.58 140.91,82.63 | J8.1 14.8,86.32 v15.1,86.02 | v24.64,85.99 25.32,86.67 J7.1 | v35.55,86.02 35.81,86.28 J6.1 | v46.39,86.01 J5.1 | J4.1 v56.93,86.7 | v67.41,86.08 67.43,86.09 J3.1 | v77.99,86.74 77.95,86.78 J2.1 | v88.5,86.43 88.47,86.47 J1.1 | J10.1 98.91,89.72 v98.91,86.06 99.68,86.83 105.26,86.83 105.59,87.16 | J11.1 109.44,87.99 110.35,87.08 115.75,87.08 116.08,87.41 | J9.1 119.91,87.09 120.52,86.48 125.86,86.48 126.54,87.17 | J12.1 130.43,87.18 131.06,86.55 136.3,86.55 137.13,87.37 | J13.1 140.94,86.97 141.49,86.42 146.83,86.42 147.59,87.18 | J14.1 151.46,85.68 | 151.46,85.68 152.24,84.9 160.9,84.9 161.89,85.89 | 151.46,85.68 151.46,79.95 J17.1 151.34,82.45 150.62,83.18 141.46,83.18 140.91,82.63 | J19.1 130.42,82.33 | 130.42,82.33 130.42,82.59 131.37,83.54 140,83.54 140.91,82.63 | J20.1 119.94,81.73 121.01,82.8 | 121.01,82.8 129.95,82.8 130.42,82.33 | J21.1 112.47,82.8 121.01,82.8 | X1.1 86.76,1.97 87.46,1.27 | 87.46,1.27 94.48,1.27 | X2.1 95.27,2.05 94.48,1.27 | EBYTEE220-900T22D1.M0 60.09,22.38 v60.22,22.51 | EBYTEE220-900T22D1.GND 75.42,18.4 v75.42,22.54 75.42,25.94 73.99,27.37 40.76,27.37 | MINI1.OUT- 38.6,25.21 40.76,27.37 | 94.48,1.27 119.33,1.27 | 119.33,1.27 122.38,4.32 122.38,10.05 X8.4 | 119.33,1.27 131.94,1.27 | X9.2 134.52,3.85 131.94,1.27 | 131.94,1.27 144.47,1.27 146.77,3.57 146.77,10.08 X7.2 | 87.46,1.27 44.5,1.27 43.87,1.9
  Bottom 0.406: 86.37,34.91 62.63,34.91 60.05,32.33 45.72,32.33 40.76,27.37 | TTL-RS1.GND 85.43,55.81 88.22,53.02 88.22,36.75 86.37,34.91 | 86.37,34.91 86.34,34.88 99.49,34.88 100.12,34.24 U1.14 114.18,34.24 118.08,30.35 118.08,19.09 119.79,17.37 131.8,17.37 135.83,21.4 135.83,54.73 141.34,60.25 166.33,60.25 v168.57,62.49 | v90.02,74.98 90.02,75.15 89.96,75.09 | 89.96,75.09 89.96,70.72 90.42,70.25 94.33,70.25 v95.06,69.51 | v83.72,74.46 89.33,74.46 89.96,75.09
GND1  (via drill 0.8)
  other vias: 105.18,67.85 122.48,67.64
  pour Bottom (isolate 1.016): 170.5,0 0,0 0,95 170.5,95
  pour Top (isolate 1.016): 170.5,0 0,0 0,95 170.5,95
L
  Bottom 1.016: X3.1 153.98,13.68 147.61,20.05 145.56,20.05 PS1.1
M1  (via drill 0.8 pad 1.2)
  Top 0.406: v62.72,21.23 63.56,22.08 72.73,22.08 73.91,20.9 79.29,20.9 80.28,19.9 80.28,16.73 81.51,15.5 104.44,15.5 111.95,23 111.95,38.09 108.64,41.39 108.64,49.93 110.2,51.49 118.61,51.49 v118.82,51.28
  Bottom 0.406: EBYTEE220-900T22D1.M1 62.63,21.15 v62.72,21.23 | v118.82,51.28 118.82,46.35 120.92,44.24 126.94,44.24 U1.29
N
  Bottom 1.016: X3.2 159.06,17.76 156.81,20.01 PS1.2
N$1
  Top 0.406: Q1.B 12.06,28.87 R13.1
N$2
  Top 0.406: R14.1 15.59,35.88 Q2.B
N$3  (via drill 0.8 pad 1)
  Top 0.406: 56.81,8.07 D3.A 56.84,7.57 v56.84,5.12
  Bottom 0.406: v56.84,5.12 56.27,4.55 X6.2
N$4
  Top 0.406: R15.1 Q3.B
N$5
  Top 0.406: R16.1 Q4.B
N$6
  Top 0.406: R17.1 Q5.B
N$7
  Top 0.406: R18.1 15.56,64.74 Q6.B
N$8
  Top 0.406: R19.1 15.56,72.35 Q7.B
N$9
  Top 0.406: R20.1 15.64,80.14 Q8.B
N$10
  Top 0.406: R21.1 Q9.B | Q9.B
N$11
  Top 0.406: R22.1 15.58,14.39 Q10.B
N$12  (via drill 0.8 pad 1.2)
  Top 0.406: Q1.E 11.03,26.97 v10.03,25.97
  Bottom 0.406: v10.03,25.97 9.16,25.97 8.56,26.57 8.56,31.52 9.95,32.92 9.95,41.28 14.56,45.88 14.56,52.17 15.46,53.06 15.46,58.22 16.35,59.12 16.35,65.34 17.16,66.15 17.16,71.33 25,79.17 34.15,79.17 36.36,81.37 47.63,81.37 49.96,83.71 59.53,83.71 59.77,83.95 73.92,83.95 75.44,85.47 82.43,85.47 85.93,88.97 J1.2
N$13  (via drill 0.8 pad 1.2)
  Top 0.406: Q2.E 9.04,33.94 v8.71,33.62
  Bottom 0.406: v8.71,33.62 8.71,41.57 13.72,46.58 13.72,52.82 14.57,53.67 14.57,58.72 15.43,59.57 15.43,65.8 16.29,66.66 16.29,71.85 24.56,80.12 33.59,80.12 35.7,82.22 47.41,82.22 49.75,84.57 59.1,84.57 59.33,84.8 73.12,84.8 75.41,87.09 J2.2
N$14  (via drill 0.8 pad 1.2)
  Top 0.406: Q3.E 8.04,41.13 v7.41,40.5
  Bottom 0.406: v7.41,40.5 7.41,41.57 12.92,47.07 12.92,53.19 13.79,54.06 13.79,59.28 14.5,59.99 14.5,66.19 15.46,67.15 15.46,72.35 24.22,81.11 33.29,81.11 35.22,83.04 46.85,83.04 49.18,85.37 57.78,85.37 59.46,87.05 63.58,87.05 64.89,88.36 J3.2
N$15  (via drill 0.8 pad 1.2)
  Top 0.406: Q4.E 12.49,48.71 v11.37,47.58
  Bottom 0.406: v11.37,47.58 11.37,53.15 12.62,54.39 12.62,59.49 13.52,60.39 13.52,66.34 14.49,67.31 14.49,73.01 23.49,82.01 25.64,82.01 28.12,84.5 32.81,84.5 33.48,83.83 46.27,83.83 49.28,86.83 52.41,86.83 54.45,88.87 54.45,89.69 J4.2
N$16  (via drill 0.8 pad 1.2)
  Top 0.406: Q5.E 12.16,55.8 v11.34,54.98
  Bottom 0.406: v11.34,54.98 11.34,59.52 12.63,60.81 12.63,66.83 13.7,67.9 13.7,73.53 23.07,82.9 25.13,82.9 27.53,85.3 33.02,85.3 33.67,84.65 42.02,84.65 43.85,86.48 J5.2
N$17  (via drill 0.8 pad 1.2)
  Top 0.406: Q6.E 12.74,62.86 v11.33,61.45
  Bottom 0.406: v11.33,61.45 11.33,66.89 12.82,68.39 12.82,74.18 14.58,75.93 14.58,75.92 22.37,83.71 24.51,83.71 27.02,86.23 32.73,86.23 33.3,86.8 33.3,89.75 J6.2
N$18  (via drill 0.8 pad 1.2)
  Top 0.406: Q7.E 12.81,70.41 v11.32,68.92
  Bottom 0.406: v11.32,68.92 11.32,73.89 22.82,85.39 22.82,89.72 J7.2
N$19  (via drill 0.8 pad 1.2)
  Top 0.406: Q8.E 13.68,78.25 v12.29,76.86
  Bottom 0.406: J8.2 12.26,87.55 11.06,86.35 11.06,77.66 11.86,76.86 v12.29,76.86
N$20  (via drill 0.8 pad 1.2)
  Top 0.406: Q9.E 12.34,19.83 v11.33,18.82
  Bottom 0.305: 10.92,32.49 9.6,31.18 9.6,28.33 11.33,26.6
  Bottom 0.406: 11.33,26.6 v11.33,18.82 | 10.92,32.49 10.92,40.7 15.62,45.4 15.62,51.63 16.52,52.53 16.52,57.59 17.39,58.46 17.39,64.72 18.26,65.59 18.26,70.75 25.57,78.06 34.71,78.06 36.95,80.3 37.2,80.55 48.11,80.55 50.48,82.92 60.05,82.92 60.29,83.16 74.31,83.16 75.76,84.61 82.77,84.61 83.31,85.16 95.26,85.16 96.41,86.3 J10.2
N$21  (via drill 0.8 pad 1.2)
  Top 0.406: Q10.E 12.47,12.51 v11.38,11.42
  Bottom 0.406: v11.38,11.42 11.38,16.91 12.68,18.21 12.68,26.72 10.59,28.82 10.59,30.76 11.83,32 11.83,40.31 16.38,44.86 16.38,51.01 17.3,51.93 17.3,57.03 18.09,57.83 18.09,64.12 19.1,65.12 19.1,70.33 25.83,77.05 35.73,77.05 38.45,79.78 48.59,79.78 50.85,82.04 60.55,82.04 60.78,82.27 74.81,82.27 76.41,83.88 83.4,83.88 83.92,84.4 100.11,84.4 101.53,85.81 106.17,85.81 106.9,86.54 J11.2
N$22  (via drill 0.8 pad 1.2)
  Top 0.406: v139.14,14.85 138.02,13.73 138.02,2.9 136.21,1.09 61.87,1.09 61.03,1.93 D4.A
  Bottom 0.406: v139.14,14.85 141,14.85 141.65,14.2 X7.1
N$23  (via drill 0.8 pad 1.2)
  Top 0.406: v69.02,14.1 69.02,11.89 D6.C
  Bottom 0.406: EBYTEE220-900T22D1.TXD 67.71,15.4 v69.02,14.1
N$24  (via drill 0.8 pad 1.2)
  Top 0.406: D5.C 81.44,14.06 81.92,14.55 105.19,14.55 113.15,22.51 113.15,39.64 115.42,41.91 v119.81,41.91
  Bottom 0.406: v119.81,41.91 127.05,41.91 U1.30
N$25  (via drill 0.8 pad 1.2)
  Top 0.406: v39.71,2.94 41.43,1.22 55.61,1.22 v57.18,2.78 | v74.98,14.23 74.98,11.82 D7.C
  Bottom 0.406: 35.85,4.73 X4.3 38.01,4.66 39.72,2.95 v39.71,2.94 | v57.18,2.78 72.13,2.78 75.02,5.67 75.02,14.19 v74.98,14.23
N$26
  Top 0.406: R40.1 42.61,80.18 Q11.B
N$27
  Top 0.406: R41.1 38.74,73.83 41.96,73.83 Q12.B
N$28
  Top 0.406: R42.1 42.62,66.15 Q13.B
N$29
  Top 0.406: R43.1 39.48,60.06 42.69,60.06 Q14.B
N$30
  Top 0.406: R44.1 28.59,80.17 Q15.B
N$31
  Top 0.406: R45.1 28.58,73.03 Q16.B
N$32
  Top 0.406: R46.1 28.61,66.18 Q17.B
N$33
  Top 0.406: R47.1 28.63,59.19 Q18.B
N$34
  Top 0.406: R48.1 56.48,80.15 Q19.B
N$35
  Top 0.406: R49.1 56.41,73.12 Q20.B
N$36  (via drill 0.8 pad 1.2)
  Top 0.406: Q11.E 39.14,78.26 v37.26,76.39
  Bottom 0.406: v37.26,76.39 37.26,76.69 39.58,79.02 49.09,79.02 51.38,81.31 61.09,81.31 61.2,81.42 75.2,81.42 76.91,83.12 83.86,83.12 84.35,83.61 100.66,83.61 101.93,84.88 107.92,84.88 109.17,86.14 116.86,86.14 117.38,86.65 J9.2
N$37  (via drill 0.8 pad 1.2)
  Top 0.406: Q12.E 42.11,71.22 40.59,69.69 35.32,69.69 v34.87,70.15
  Bottom 0.406: v34.87,70.15 34.87,71.77 41.37,78.27 49.57,78.27 51.74,80.44 61.34,80.44 61.49,80.59 75.58,80.59 77.37,82.38 84.28,82.38 84.81,82.91 101.36,82.91 102.43,83.98 108.47,83.98 109.79,85.3 117.33,85.3 117.75,85.72 127.63,85.72 127.9,85.99 127.9,89.71 J12.2
N$38  (via drill 0.8 pad 1.2)
  Top 0.406: Q13.E 38.1,64.31 v36.22,62.43
  Bottom 0.406: v36.22,62.43 36.53,62.73 36.53,72.06 41.88,77.41 50.06,77.41 51.42,78.78 60.81,78.78 61.78,79.75 75.88,79.75 77.77,81.64 84.68,81.64 85.19,82.15 101.98,82.15 102.89,83.06 109.06,83.06 110.5,84.5 117.92,84.5 118.25,84.82 128.42,84.82 129.15,85.55 137.6,85.55 138.4,86.35 J13.2
N$39  (via drill 0.8 pad 1.2)
  Top 0.406: Q14.E 41.39,58.24 40.37,57.22 37.77,57.22 v37.15,56.59
  Bottom 0.406: v37.15,56.59 37.15,60.39 37.9,61.14 37.9,71.87 42.6,76.57 50.53,76.57 51.88,77.92 61.07,77.92 62.03,78.88 76.31,78.88 78.31,80.87 85.19,80.87 85.73,81.41 102.71,81.41 103.49,82.19 109.58,82.19 111.12,83.73 128.77,83.73 129.54,84.5 137.9,84.5 138.88,85.48 148.22,85.48 148.93,86.19 J14.2
N$40  (via drill 0.8 pad 1.2)
  Top 0.406: Q15.E 27.69,78.26 26.59,77.16 26.59,75.76 v26.09,75.26
  Bottom 0.406: v26.09,75.26 22.19,71.36 22.19,63.7 20.95,62.46 20.95,53.28 23.64,50.59 40.71,50.59 47.19,57.06 53.04,57.06 53.55,56.56 64.49,56.56 66.61,58.67 66.61,65.63 70.28,69.31 73.64,69.31 77.13,72.8 79.52,72.8 82.46,75.74 88.6,75.74 89.32,76.46 93.59,76.46 100.65,69.4 119.01,69.4 120.12,70.52 129.01,70.52 133.16,66.38 139.3,66.38 145.12,72.2 161.33,72.2 164.39,75.25 164.39,90.92 162.62,92.69 159.64,92.69 159.3,92.35 159.3,89.83 J15.2
N$41  (via drill 0.8 pad 1.2)
  Top 0.406: Q16.E 26.38,71.17 v24.81,69.59
  Bottom 0.406: v24.81,69.59 24.81,64.74 21.76,61.69 21.76,53.76 24.05,51.47 40.21,51.47 46.6,57.86 53.8,57.86 54.35,57.31 64.13,57.31 65.83,59.01 65.83,66.17 69.88,70.22 73.06,70.22 76.59,73.76 79.15,73.76 81.87,76.48 88.14,76.48 88.87,77.2 94.16,77.2 101.11,70.26 118.31,70.26 119.59,71.54 130.16,71.54 134.18,67.52 139.02,67.52 144.73,73.23 157.11,73.23 159.38,75.49 159.38,79.79 J16.2
N$42  (via drill 0.8 pad 1.2)
  Top 0.406: Q17.E 26.31,64.27 v25.24,63.2
  Bottom 0.406: v25.24,63.2 25.17,63.2 22.68,60.72 22.68,54.81 24.52,52.96 40.32,52.96 46.04,58.69 54.38,58.69 54.97,58.1 63.77,58.1 65.06,59.39 65.06,66.58 69.53,71.06 72.61,71.06 76.27,74.71 78.8,74.71 78.8,74.75 81.28,77.23 87.7,77.23 88.37,77.9 95.25,77.9 101.95,71.19 117.83,71.19 119.02,72.39 130.93,72.39 134.87,68.45 138.38,68.45 144.21,74.28 147.59,74.28 148.8,75.49 J17.2
N$43  (via drill 0.8 pad 1.2)
  Top 0.406: Q18.E 25.54,57.28 v24.3,56.05
  Bottom 0.406: v24.3,56.05 24.3,55.22 25.71,53.8 39.67,53.8 45.41,59.53 55,59.53 55.64,58.9 63.43,58.9 64.27,59.74 64.27,67.21 68.98,71.92 72.19,71.92 75.86,75.59 78.28,75.59 78.28,75.61 80.62,77.96 87.14,77.96 87.8,78.61 95.86,78.61 102.41,72.07 117.35,72.07 118.55,73.26 127.71,73.26 128.63,74.18 136.76,74.18 138.33,75.75 J18.2
N$44  (via drill 0.8 pad 1.2)
  Top 0.406: Q19.E 53.56,78.24 52.86,77.54 52.86,76.38 v52.87,76.39
  Bottom 0.406: v52.87,76.39 52.87,72.66 51.37,71.16 51.37,65.84 50.52,64.99 50.52,62 51.26,61.26 54.7,61.26 55.51,62.06 55.51,64.33 56.36,65.18 56.36,73.78 57.69,75.11 61.97,75.11 63.35,76.49 77.73,76.49 79.97,78.73 86.72,78.73 87.28,79.28 96.61,79.28 102.9,72.99 116.82,72.99 117.98,74.16 126.89,74.16 127.88,75.14 J19.2
N$45  (via drill 0.8 pad 1.2)
  Top 0.406: Q20.E 53.89,71.19 v52.78,70.09
  Bottom 0.406: v52.78,70.09 52.78,65.69 51.35,64.26 51.35,62.41 51.68,62.08 54.24,62.08 54.66,62.5 54.66,64.62 55.52,65.48 55.52,74.49 56.95,75.92 61.59,75.92 62.91,77.24 77.28,77.24 79.47,79.44 86.28,79.44 86.81,79.97 97.26,79.97 103.31,73.92 116.46,73.92 117.4,74.86 J20.2
N$46
  Top 0.406: R51.1 55.84,66.23 55.89,66.18 56.4,66.18 Q21.B
N$47  (via drill 0.8 pad 1.2)
  Top 0.406: Q21.E 53.41,64.29 v52.88,63.76
  Bottom 0.406: v52.88,63.76 52.88,64.08 54.63,65.83 54.63,74.9 56.72,77 61.34,77 62.44,78.1 76.9,78.1 78.98,80.18 85.77,80.18 86.3,80.71 98.6,80.71 102.89,76.42 102.89,75.78 103.84,74.83 106.66,74.83 107.06,75.23 107.06,79.69 J21.2
N$48
  Top 0.406: R52.1 32.78,17.1 U4.1
N$50
  Top 0.406: R53.1 U4.4
N$52  (via drill 0.8 pad 1.2)
  Top 0.406: v22.81,24.7 23.22,24.29 D8.A 25.62,22.84 28.48,19.98 Q22.3
  Bottom 0.406: K1.16 24.19,26.09 v22.81,24.7
N$53
  Top 0.406: Q22.1 26.76,11.05 26.17,11.64 26.17,19.46 25.69,19.94 24.08,19.94 U4.3
RX1
  Bottom 0.305: 103.62,58.39 98.31,58.39 97.58,57.66
  Bottom 0.406: U1.27 124.21,49.48 121.51,52.18 121.51,56.29 119.41,58.39 103.62,58.39 | 97.58,57.66 97.58,37.85 96.7,36.98 91.03,36.98 90.29,37.72 90.29,55.04 88.3,57.04 TTL-RS1.RX
RX_LORA  (via drill 0.8 pad 1.2)
  Top 0.406: R23.1 84.99,9.41 83.08,7.49 D5.A 80.28,7.49 79.73,8.05 79.73,14.45 78.4,15.77 65.13,15.77 v65.09,15.82
  Bottom 0.406: X4.2 33.24,7.58 33.94,8.28 38.45,8.28 41.03,10.87 41.03,15.53 45.02,19.51 45.02,24.59 46.52,26.09 63.25,26.09 65.17,24.17 65.17,18.36 | 65.17,18.36 EBYTEE220-900T22D1.RXD | v65.09,15.82 65.09,18.29 65.17,18.36
SCL  (via drill 0.8 pad 1.2)
  Top 0.305: 99.48,35.53 102.73,35.53 105.86,38.66
  Top 0.406: R26.1 90.4,61.53 89.8,60.94 84.83,60.94 83.59,62.18 83.59,69.66 84.66,70.73 | 84.66,70.73 83.49,70.73 v83.32,70.9 | 84.66,70.73 U3.22 | U2.22 70.78,70.72 73.42,68.07 74.62,68.07 75.22,67.47 v75.22,65.07 74.99,64.84 R27.1 | v79.73,44.35 91.89,44.35 v91.9,44.34 | v92.19,38.5 95.16,35.53 99.48,35.53 | 105.86,38.66 105.86,63.95 v105.87,63.95
  Bottom 0.406: v83.32,70.9 82.91,71.3 81.45,71.3 v75.22,65.07 69.45,65.07 68.05,63.67 68.05,58.53 65.49,55.97 65.49,42.81 67.03,41.26 76.7,41.26 79.73,44.3 v79.73,44.35 | v91.9,44.34 91.9,38.79 v92.19,38.5 | v105.87,63.95 121.87,63.95 123.65,62.18 U1.22
SDA  (via drill 0.8 pad 1.2)
  Top 0.305: 98.2,38.04 103.03,38.04 104.22,39.23
  Top 0.406: U3.23 86.22,70.09 85.05,70.09 84.39,69.42 84.39,64.4 85.05,63.74 R29.1 87.45,63.71 v87.45,62.23 | U2.23 68.81,70.08 65.53,70.08 64.75,69.31 64.75,65.81 65.66,64.9 R28.1 69.15,62.92 69.6,62.47 72.83,62.47 v73.32,62.96 | v78.19,45.77 93.82,45.77 v94.04,45.55 | v94.25,38.6 94.81,38.04 98.2,38.04 | 104.22,39.23 104.22,61.67 v104.28,61.73
  Bottom 0.406: v87.45,62.23 88.54,63.31 96.05,63.31 97.94,65.21 97.94,66.69 96.95,67.69 93.4,67.69 91.73,69.36 82.12,69.36 75.72,62.96 v73.32,62.96 70.01,62.96 69.24,62.19 69.24,58.21 66.57,55.54 66.57,43.45 67.59,42.43 74.85,42.43 v78.19,45.77 | v94.04,45.55 94.04,38.81 v94.25,38.6 | v104.28,61.73 117.44,61.73 122.59,56.58 122.59,55.14 123.17,54.56 U1.25
TX1
  Bottom 0.305: 104.57,55.86 99.35,55.86 98.7,55.22 | 86.87,57.2 86.87,60.29 87.32,60.74 90.95,60.74 91.3,60.38 91.3,58.91 TTL-RS1.TX
  Bottom 0.406: U1.28 122.91,46.94 120.38,49.47 120.38,55.95 119.06,57.26 105.98,57.26 104.57,55.86 | 98.7,55.22 98.7,36.71 97.9,35.9 90.45,35.9 89.28,37.07 89.28,54 86.84,56.44 86.84,57.18 86.87,57.2
TX_LORA  (via drill 0.8 pad 1.2)
  Top 0.406: D6.A 70,6.64 70.51,6.64 70.53,6.66 71.04,6.66 | R25.1 72.06,7.68 71.04,6.66 | 71.04,6.66 74.09,6.66 D7.A 77.69,7.53 78.06,7.9 R24.1 78.06,5.36 78.62,4.79 82.92,4.79 85.52,7.39 92.06,7.39 96.27,11.6 99.95,11.6 105.82,5.73 109.04,5.73 109.8,6.48 109.8,13.03 115.92,19.15 115.92,34.8 119.4,38.28 v119.45,38.28
  Bottom 0.406: v119.45,38.28 120.39,39.22 127,39.22 U1.31
VCC  (via drill 0.8 pad 1, 0.8 pad 1.2)
  Top 0.305: R10.2 15.74,74.03 16.12,73.65 19.43,73.65 20.7,72.39 20.7,69.55 v20.61,69.46 | v19.62,63.2 19.62,65.65 19.22,66.04 16.19,66.04 15.67,66.56 15.67,67.51 R9.2 | R8.2 15.74,59.3 16.23,58.81 18.65,58.81 19.39,58.07 v19.33,58 | v20.65,51.09 19.83,51.91 16.31,51.91 15.71,52.51 R7.2 | R6.2 15.76,44.81 16.28,44.3 20.05,44.3 20.74,44.99 v20.74,46.15 | v33.06,74.1 29.72,74.1 28.78,75.04 R34.2 | R30.2 42.8,75.01 43.62,74.19 46.2,74.19 v47.27,73.12 47.39,73.12 49.18,74.9 55.85,74.9 R38.2 | U3.24 87.6,69.42 87.93,69.75 87.93,70.96 87.51,71.37 U3.21
  Top 0.406: U3.24 85.65,69.42 85.36,69.13 85.36,66.45 86.17,65.64 R29.2 87.48,65.63 R26.2 91.77,65.63 92.11,65.28 92.11,62.55 v93.59,61.07 | R53.2 24.02,7.85 | 24.02,7.85 24.02,7.61 16.41,7.61 15.74,8.27 R12.2 15.72,9.99 v13.96,9.99 | v14.11,17.25 15.74,17.25 R11.2 | v13.98,24.31 15.74,24.31 R3.2 | v13.68,31.55 15.69,31.55 R4.2 | v13.93,38.44 R5.2 | R5.2 | R37.2 27.36,54.61 v26.44,55.53 | v26.52,61.52 28.7,61.52 R36.2 | v26.48,68.65 R35.2 | R35.2 | R33.2 39.33,55.97 v38.77,55.41 | v41.02,62.28 42.79,62.28 R32.2 | R31.2 42.51,68.33 v40.85,68.33 35.07,68.33 v34.67,67.93 | v48.66,63.18 47.92,63.92 47.92,67.7 48.9,68.68 R39.2 | R50.2 56.63,60.41 v56.83,60.22 | U2.24 67.22,69.42 66.67,68.86 66.67,67.23 67.1,66.8 R28.2 69.21,66.74 R27.2 73.54,66.74 v73.74,66.55 | v33.31,24.3 v33.3,24.29 D8.C | v72.14,13.56 72.06,13.49 R25.2 | U3.21 84.88,71.37 83.54,72.71 v83.45,72.71 | v86.55,31.58 86.55,38.05 v86.48,38.12 | v86.5,51.49 93.49,51.49 v94.31,52.31 | v33.06,74.1 33.06,81.48 v31.58,82.96 | v28.37,82.55 25.32,82.55 23.39,84.48 5.99,84.48 4.14,82.63 4.14,10.98 v6.03,9.1 | v52.34,14.68 52.55,14.47 D2.C 53.88,11.92 54.66,11.14 54.66,3.41 53.43,2.18 42.77,2.18 37.4,7.55 25.33,7.55 25.07,7.55 24.32,7.55 24.02,7.85
  Bottom 0.305: v20.61,69.46 20.61,64.71 19.62,63.72 v19.62,63.2 19.33,62.91 v19.33,58 19.33,52.42 v20.65,51.09 20.65,46.19 20.68,46.15 v20.74,46.15
  Bottom 0.406: 14,24.29 13.61,23.89 13.61,17.76 v14.11,17.25 13.21,16.36 13.21,10.75 v13.96,9.99 13.07,9.1 v6.03,9.1 | 14,24.29 | 14,24.29 v13.98,24.31 13.98,27.15 12.08,29.05 12.08,30.42 13.21,31.55 v13.68,31.55 13.6,31.63 | 13.6,31.63 12.88,32.34 12.88,37.74 | 12.88,37.74 13.58,38.44 v13.93,38.44 | 12.88,37.74 12.88,40.15 17.01,44.28 19.96,44.28 20.73,45.05 20.73,46.1 20.68,46.15 | 39.7,61.47 40.51,62.28 v41.02,62.28 48.15,62.28 48.66,62.79 v48.66,63.18 48.65,63.16 48.65,62.57 50.76,60.45 56.6,60.45 v56.83,60.22 | 39.7,61.47 38.77,60.54 v38.77,55.41 38.02,54.66 27.32,54.66 v26.44,55.53 26.44,61.43 v26.52,61.52 26.85,61.84 26.85,68.3 26.5,68.65 v26.48,68.65 26.48,73.18 27.4,74.1 v33.06,74.1 33.03,74.07 33.03,68.67 33.77,67.93 v34.67,67.93 | 39.7,61.47 39.7,67.62 40.41,68.33 v40.85,68.33 41.76,69.24 41.76,72.19 42.68,73.11 v47.26,73.11 v47.27,73.12 | v33.31,24.3 33.31,26.69 K1.1 31.81,29.69 29.87,31.63 13.6,31.63 | EBYTEE220-900T22D1.VCC 72.79,15.74 | 72.79,15.74 72.14,15.09 v72.14,13.56 72.14,11.76 71.31,10.93 | K1.S1 31.81,48.5 31.18,49.12 22.62,49.12 v20.65,51.09 | v93.59,61.07 94.27,60.39 TTL-RS1.VCC 94.31,58.88 v94.31,52.31 | X8.1 107.08,20.35 105.82,21.61 101.77,21.61 U1.19 101.68,21.52 99.73,21.52 97.39,23.86 84.43,23.86 | 72.79,15.74 77.46,15.74 78.93,17.2 78.93,22.42 80.37,23.86 84.43,23.86 | 71.31,10.93 71.3,10.92 | v73.74,66.55 74.92,66.55 81.08,72.71 v83.45,72.71 | 84.43,23.86 86.55,25.98 v86.55,31.58 | v86.48,38.12 86.48,51.21 86.63,51.36 v86.5,51.49 | v31.58,82.96 31.17,82.55 v28.37,82.55 | v52.34,14.68 52.34,11.99 53.4,10.93 71.31,10.93

## Text on the board
tNames: 12V+ | IN1 | 12V- | 12V+ | IN2 | 12V- | 12V+ | IN3 | 12V- | 12V+ | IN4 | 12V- | 12V+ | IN5 | 12V- | 12V+ | IN6 | 12V- | 12V+ | IN7 | 12V- | 12V+ | IN8 | 12V- | IN9 | 12V- | 12V+ | IN10 | 12V- | 12V+ | IN11 | 12V- | 12V+ | IN12 | 12V- | 12V+ | IN13 | 12V- | 12V+ | IN14 | 12V- | 12V+ | IN15 | 12V- | 12V+ | 12V+ | IN21 | 12V- | 12V+ | IN20 | 12V- | 12V+ | IN19 | 12V- | 12V+ | IN18 | 12V- | 12V+ | IN17 | 12V- | 12V+ | IN16 | 12V- | GND | IN+ | N | 5V+ | A+ | B- | 5V- | 12V+ | L | 12V- | 12V+ | 12V- | GND | GND | RX | TX | GND | GND | CYBLE1 | CYBLE1 | GND | BATTERY | CYBLE